# Altium PCB Planar_HB_3.PcbDoc
Units mm, origin at the board's own origin, x right, y up, seen from the top; angles counter-clockwise.
Board outline 20 x 34.23 mm, 4 copper layers (Layer 1, Layer 2, Layer 3, Layer 4), stack 0.603 mm thick; 6 components, 3 nets, 22 pads, 0 vias.
Unrouted connection lines stored in the file: 3.
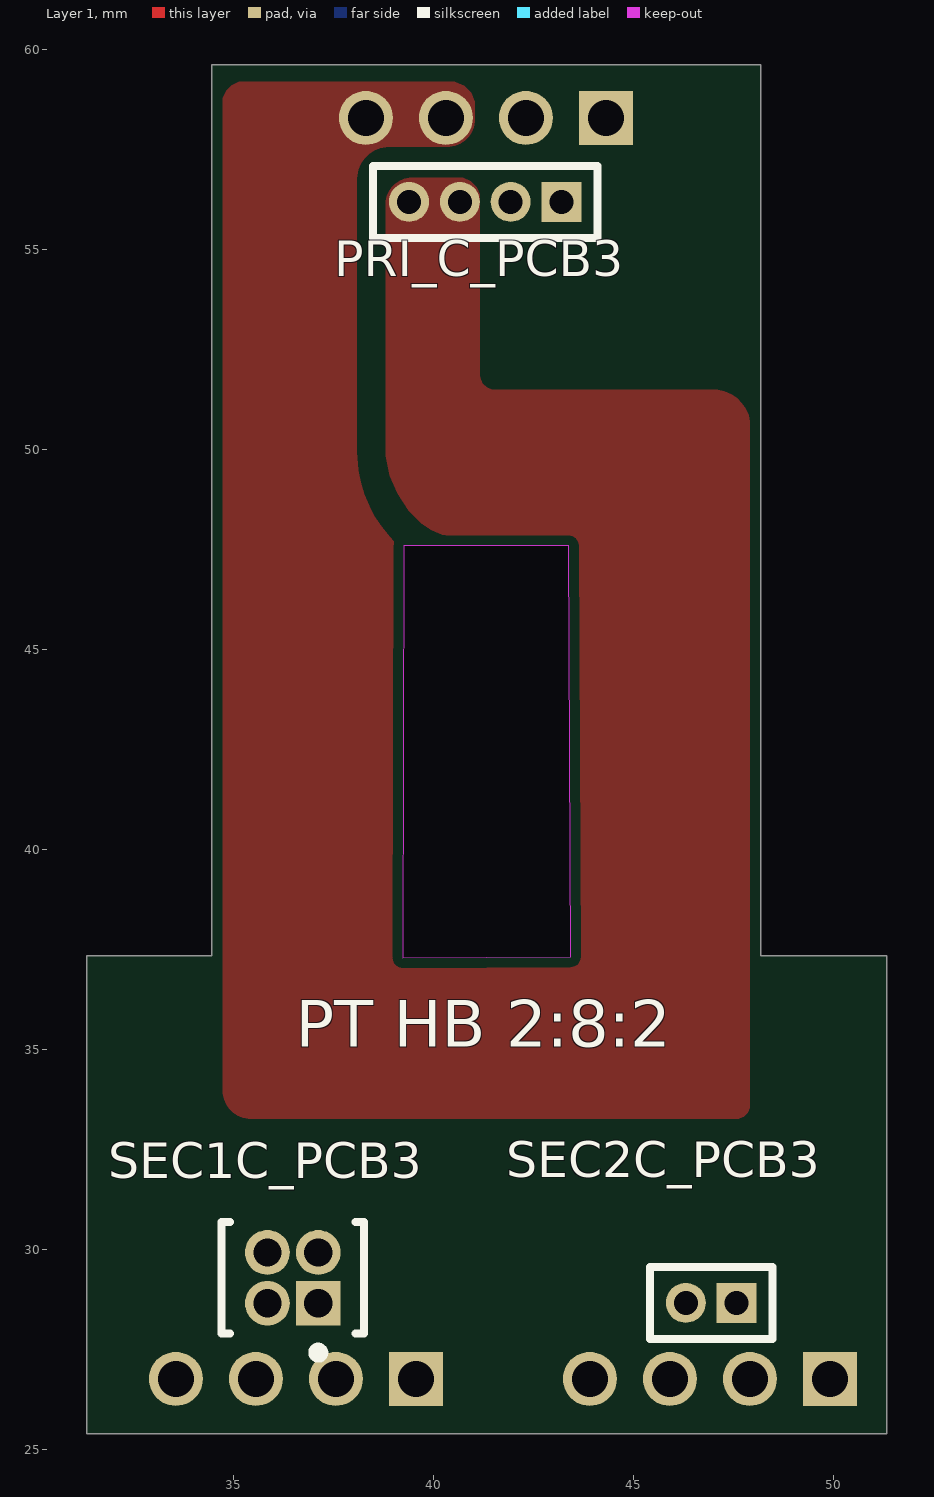
[diagram p0: Layer 1 view]
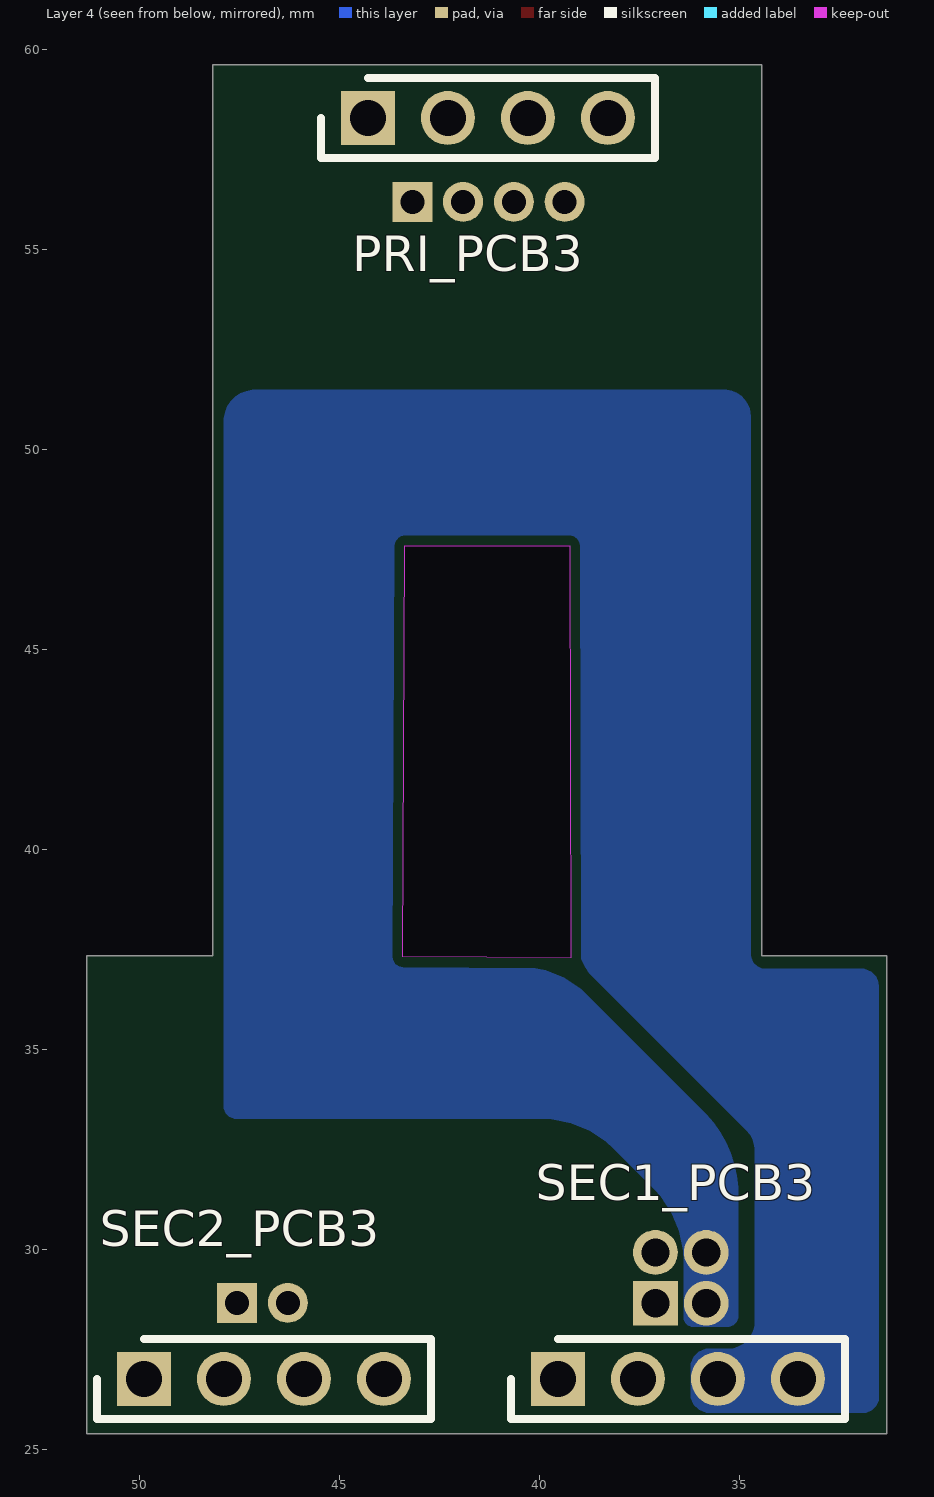
[diagram p1: Layer 4 view, seen from below]
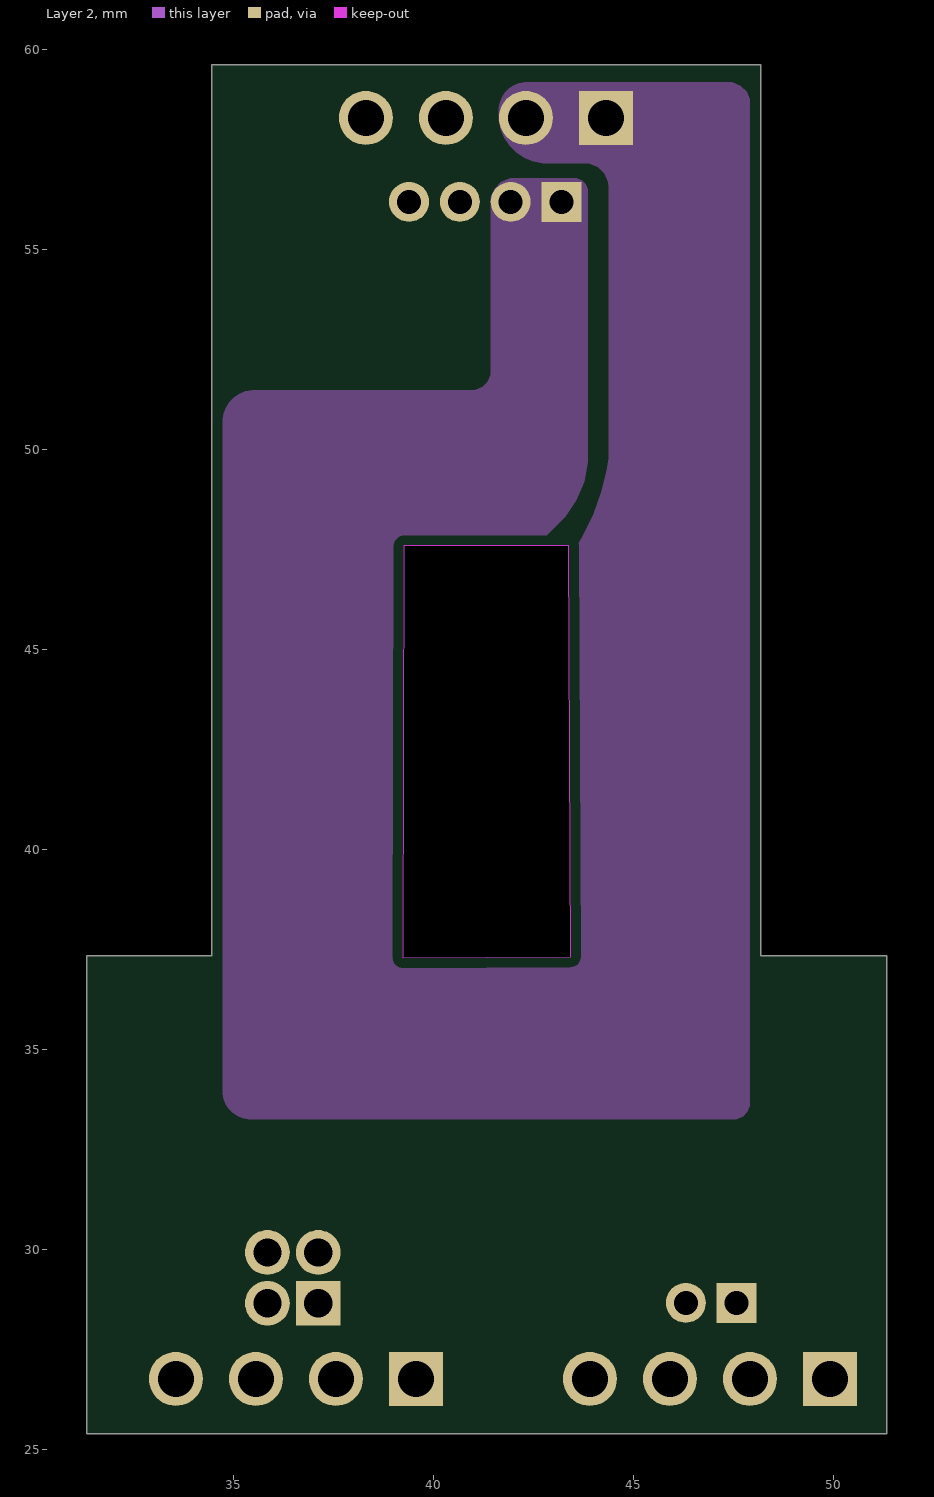
[diagram p2: Layer 2]
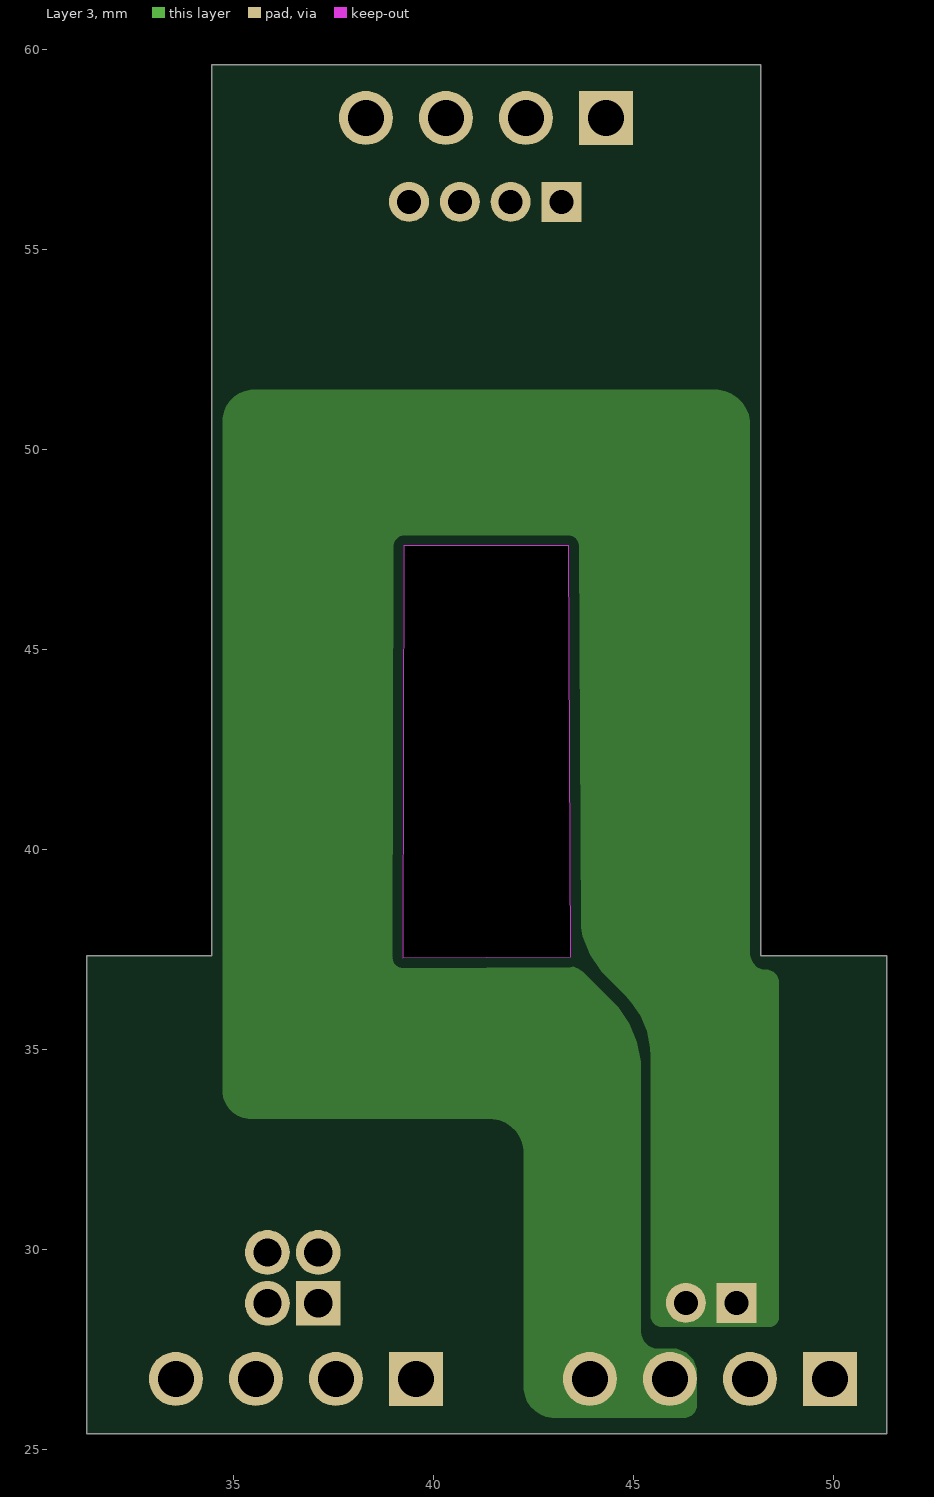
[diagram p3: Layer 3]

## Layer stack, top to bottom
Top Solder: solder mask 0.0102, Solder Resist, Dk 3.5
Layer 1: signal copper 0.0356
Dielectric 2: prepreg 0.0711, PP-006, Dk 4.1
Layer 2: signal copper 0.035
Dielectric 1: dielectric 0.32, FR-4, Dk 4.8
Layer 3: signal copper 0.035
Dielectric 3: prepreg 0.0711, PP-006, Dk 4.1
Layer 4: signal copper 0.0356
Bottom Solder: solder mask 0.0102, Solder Resist, Dk 3.5

## Board outline
31.325,25.4 31.325,37.35 34.45,37.35 34.45,59.625 48.175,59.625 48.175,37.35 51.325,37.35 51.325,25.4
cut-out: 39.25,47.6 39.225,37.3 43.425,37.325 43.375,47.6

## Design rules (kind name [scope] priority, off if disabled: settings)
Clearance [All] p1: gap=0.254 ignorepadtopadclearanceinfootprint=FALSE except(0: Arc-Hole Track-Hole SMDPad-Hole THPad-Hole Via-Hole Fill-Hole Poly-Hole Region-Hole Text-Hole)
PlaneConnect [All] p1: planeconnectstyle=Direct reliefexpansion=0.508 reliefentries=4 reliefconductorwidth=0.254 reliefairgap=0.254
PolygonConnect [All] p1: connectstyle=Direct reliefconductorwidth=0.254 reliefentries=4 polygonreliefangle="90 Angle" airgapwidth=0.254
RoutingVias [All] p1: holewidth=0.711 width=1.27 viastyle="Through Hole" minholewidth=0.711 minwidth=1.27 maxholewidth=0.711 maxwidth=1.27
SolderMaskExpansion [All] p1: expansion=0.102 istentingtop=FALSE
Width [All] p1: maxlimit=10 minlimit=0.254 preferedwidth=0.254
29 further rules are at their usual default settings.

## Components (designator, comment, footprint, x,y, rotation, side; value= is the part's Value field where it differs from the comment)
PRI_C_PCB3 "MHDR1X4" MHDR1X4 43.19,56.2 r180 top
PRI_PCB3 "M22-2510405" HDRV4W50P0X200_1X4_800X200X525P 44.3,58.3 r180 bottom locked
SEC1_PCB3 "M22-2510405" HDRV4W50P0X200_1X4_800X200X525P 39.55,26.775 r180 bottom locked
SEC1C_PCB3 "FTS-102-01-L-D" FP-FTS-102-01-L-D-MFG 36.475,29.3 r90 top locked
SEC2_PCB3 "M22-2510405" HDRV4W50P0X200_1X4_800X200X525P 49.9,26.775 r180 bottom locked
SEC2C_PCB3 "MHDR1X2" MHDR1X2 47.57,28.675 r180 top locked

## Footprints (in the part's own frame and the unit in brackets; to place one, negate y for a bottom-side part, rotate by r counter-clockwise, add the part's x,y. Pads: shape width x height; smd on the part's side, far side on the other; paste and mask are expansions set on the pad)
FP-FTS-102-01-L-D-MFG [mm]
  rect 1.12x1.12 hole 0.71 paste-1000 mask+0: 1(-0.635,-0.635)
  round 1.12 hole 0.71 paste-1000 mask+0: 2(-0.635,0.635) 3(0.635,-0.635) 4(0.635,0.635)
  silkscreen extent -1.99,-1.78 1.4,1.78, body extent -1.27,-1.72 1.27,1.71, height 4.17
HDRV4W50P0X200_1X4_800X200X525P [mm]
  rect 1.35x1.35 hole 0.9: 1(0,0)
  round 1.35 hole 0.9: 2(2,0) 3(4,0) 4(6,0)
  silkscreen extent -1.18,-1 7.17,1, body extent -1,-1 7,1, height 5.25
MHDR1X2 [mm] "Connector; Header; 2 Position"
  rect 1x1 hole 0.6: 1(0,0)
  round 1 hole 0.6: 2(1.27,0)
  silkscreen extent -0.9,-0.9 2.17,0.9
MHDR1X4 [mm] "Connector; Header; 4 Position"
  rect 1x1 hole 0.6: 1(0,0)
  round 1 hole 0.6: 2(1.27,0) 3(2.54,0) 4(3.81,0)
  silkscreen extent -0.9,-0.9 4.71,0.9

## Part data
PRI_C_PCB3: "Header, 4-Pin", LatestRevisionDate=17-Jul-2002, LatestRevisionNote="Re-released for DXP Platform.", Publisher="Altium Limited"
PRI_PCB3 SEC1_PCB3 SEC2_PCB3: "Connector", Manufacturer_Name=Harwin, Mouser Part Number=855-M22-2510405, Datasheet Link=https://cdn.harwin.com/pdfs/M22-251.pdf, Height=5.25mm, Manufacturer_Part_Number=M22-2510405, Mouser Price/Stock=https://www.mouser.co.uk/ProductDetail/Harwin/M22-2510405?qs=vF78I%252BjhbY9z7PsFZBZ5CA%3D%3D
SEC1C_PCB3: library part CMP-02766-000107-1, "CONN HEADER VERT 4POS 1.27MM", Color=Black, Max Current Rating=1.75A, Max Operating Temperature=125°C, Min Operating Temperature=-55°C, Package Quantity=1, Connector Type="Male Pin", Contact Material=Bronze, Contact Mating Length=0.12inch, Contact Plating=Gold, Depth=3.42mm, Gender=Male, Housing Color=Black, Housing Material=Polymer, Lead Free="Lead Free", Length=2.54mm, Mount="Through Hole", Number of Contacts=4, Number of Positions=4, Number of Rows=2, Orientation=Straight, Packaging=Bulk, Pitch=1.27mm, Radiation Hardening=No, REACH SVHC="No SVHC", Row Spacing=0.05inch, Termination=Solder
SEC2C_PCB3: "Header, 2-Pin", LatestRevisionDate=17-Jul-2002, LatestRevisionNote="Re-released for DXP Platform.", Publisher="Altium Limited"

## Nets (pads, with @x,y where several pads share a name; then routed paths per layer and width w, separated by ;. In a path a pad name is that pad's centre, name@x,y a point inside that pad or via, vN(x,y) a via of type N, cw(c..) or ccw(c..) an arc to the next point about the centre after c; other vN are vias at no path point)
P_PCB3: PRI_C_PCB3.1 PRI_C_PCB3.2 PRI_C_PCB3.3 PRI_C_PCB3.4 PRI_PCB3.1 PRI_PCB3.2 PRI_PCB3.3 PRI_PCB3.4
S1_1_PCB3: SEC1_PCB3.3 SEC1_PCB3.4 SEC1C_PCB3.1 SEC1C_PCB3.2 SEC1C_PCB3.3 SEC1C_PCB3.4
S2_1_PCB3: SEC2_PCB3.3 SEC2_PCB3.4 SEC2C_PCB3.1 SEC2C_PCB3.2
pads on no net: SEC1_PCB3.1 SEC1_PCB3.2 SEC2_PCB3.1 SEC2_PCB3.2

## Polygon pours and split planes (outlines as drawn)
P_PCB3 on Layer 2 "NONET_L-01_P-001" (solid, remove dead copper, pour order 13): 41.627,58.492 cw(c42.327,58.492) 42.327,59.192 47.352,59.192 cw(c47.352,58.642) 47.902,58.642 47.902,33.692 cw(c47.477,33.692) 47.477,33.267 35.426,33.267 cw(c35.426,33.976) 34.717,33.976 34.717,50.683 cw(c35.527,50.683) 35.527,51.492 40.952,51.492 ccw(c40.952,51.967) 41.427,51.967 41.427,56.192 cw(c42.027,56.192) 42.027,56.792 43.502,56.792 cw(c43.502,56.442) 43.852,56.442 43.852,49.945 cw(c41.312,49.945) 43.108,48.149 42.752,47.792 39.243,47.792 ccw(c39.243,47.542) 38.993,47.542 38.993,37.342 ccw(c39.252,37.342) 39.252,37.084 43.352,37.084 ccw(c43.352,37.342) 43.611,37.342 43.611,47.646 ccw(c38.66,50.63) 44.377,49.773 44.377,56.567 ccw(c43.777,56.567) 43.777,57.167 42.827,57.167 cw(c42.827,58.367) 41.627,58.367
P_PCB3 on Layer 1 "NONET_L-01_P-001" (solid, remove dead copper, pour order 14): 40.628,56.797 cw(c40.628,56.272) 41.153,56.272 41.153,51.872 ccw(c41.528,51.872) 41.528,51.497 47.003,51.497 cw(c47.003,50.597) 47.903,50.597 47.903,33.622 cw(c47.553,33.622) 47.553,33.272 35.428,33.272 cw(c35.428,33.972) 34.728,33.972 34.728,58.697 cw(c35.228,58.697) 35.228,59.197 40.403,59.197 cw(c40.403,58.572) 41.028,58.572 41.028,58.272 cw(c40.328,58.272) 40.328,57.572 38.878,57.572 ccw(c38.878,56.772) 38.078,56.772 38.078,49.953 ccw(c41.236,49.953) 39.003,47.72 39.003,37.347 ccw(c39.253,37.347) 39.253,37.097 43.403,37.097 ccw(c43.403,37.322) 43.628,37.322 43.628,47.522 ccw(c43.328,47.522) 43.328,47.822 40.629,47.822 cw(c40.629,49.274) 39.603,48.247 39.546,48.304 cw(c41.343,50.1) 38.803,50.1 38.803,56.147 cw(c39.453,56.147) 39.453,56.797 39.978,56.797
S1_1_PCB3 on Layer 4 "NONET_L-01_P-001" (solid, remove dead copper, pour order 16): 36.4,29.723 cw(c38.94,29.723) 37.144,31.519 38.156,32.531 cw(c39.952,30.735) 39.952,33.275 47.575,33.275 ccw(c47.575,33.6) 47.9,33.6 47.9,50.711 ccw(c47.111,50.711) 47.111,51.5 35.4,51.5 ccw(c35.4,50.825) 34.725,50.825 34.725,37.375 cw(c34.375,37.375) 34.375,37.025 31.975,37.025 ccw(c31.975,36.575) 31.525,36.575 31.525,26.325 ccw(c31.925,26.325) 31.925,25.925 35.75,25.925 ccw(c35.75,26.4) 36.225,26.4 36.225,27.062 ccw(c35.762,27.062) 35.762,27.525 35.35,27.525 cw(c35.312,28.212) 34.625,28.175 34.625,32.531 cw(c35.379,32.463) 34.894,33.044 38.699,36.849 ccw(c37.974,37.575) 39,37.575 39,47.559 cw(c39.25,47.559) 39.25,47.809 43.35,47.809 cw(c43.35,47.55) 43.609,47.55 43.609,37.35 cw(c43.35,37.35) 43.35,37.091 40.593,37.091 ccw(c40.593,34.551) 38.797,36.347 35.944,33.494 ccw(c37.989,31.367) 35.039,31.425 35.039,28.361 ccw(c35.325,28.361) 35.325,28.075 36.175,28.075 ccw(c36.175,28.3) 36.4,28.3
S2_1_PCB3 on Layer 3 "NONET_L-01_P-001" (solid, remove dead copper, pour order 17): 48.4,28.075 ccw(c48.4,28.3) 48.625,28.3 48.625,36.675 ccw(c48.3,36.675) 48.3,37 cw(c48.3,37.4) 47.9,37.4 47.9,50.625 ccw(c47.025,50.625) 47.025,51.5 35.5,51.5 ccw(c35.5,50.725) 34.725,50.725 34.725,33.975 ccw(c35.425,33.975) 35.425,33.275 41.4,33.275 cw(c41.4,32.425) 42.25,32.425 42.25,26.575 ccw(c43.025,26.575) 43.025,25.8 46.25,25.8 ccw(c46.25,26.125) 46.575,26.125 46.575,26.9 ccw(c45.95,26.9) 45.95,27.525 45.6,27.525 cw(c45.6,27.95) 45.175,27.95 45.175,34.448 ccw(c42.635,34.448) 44.431,36.244 43.775,36.9 ccw(c43.292,36.417) 43.292,37.1 39.275,37.1 cw(c39.275,37.375) 39,37.375 39,47.575 cw(c39.225,47.575) 39.225,47.8 43.4,47.8 cw(c43.4,47.575) 43.625,47.575 43.625,38.577 ccw(c46.165,38.577) 44.369,36.781 44.8,36.35 cw(c43.291,34.841) 45.425,34.841 45.425,28.35 ccw(c45.7,28.35) 45.7,28.075

## Silkscreen, mask and mechanical layers (free items; w line width, h text height)
Top Overlay:
  text "PT HB 2:8:2" at 36.55,34.696 h2
Mechanical 1:
  lines w0.2: 31.325,25.4 51.325,25.4 51.325,37.35 48.175,37.35 48.175,59.625 34.45,59.625 34.45,37.35 31.325,37.35 31.325,25.4 ; 39.24,37.341 43.39,37.341 43.39,47.591 39.24,47.591 39.24,37.341